# Allegro board 4BITCOUNTER.brd
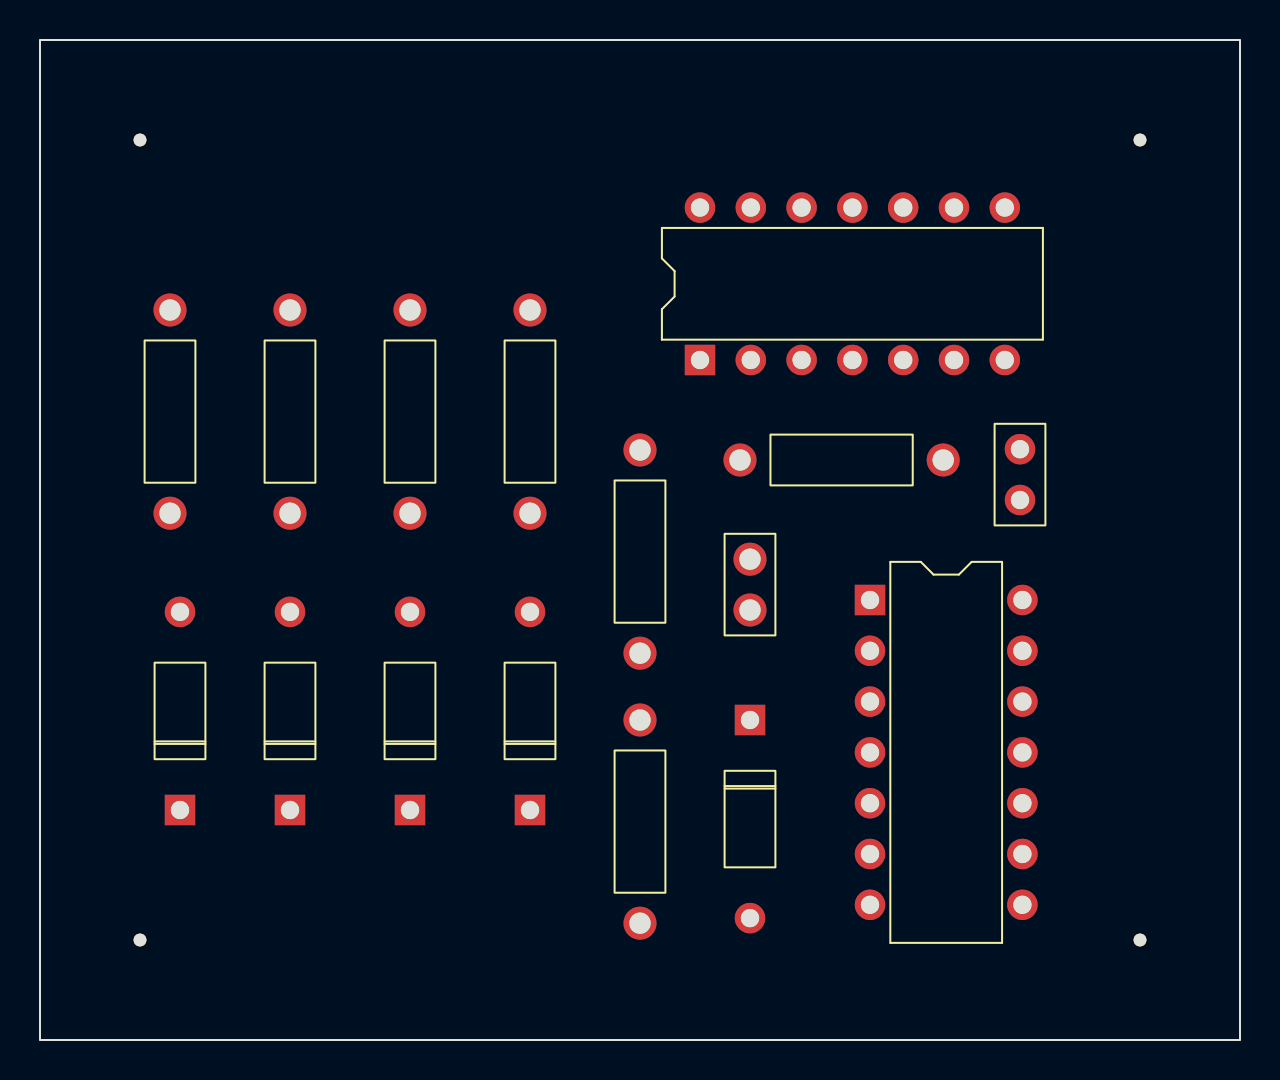
[diagram p0: board, top side]
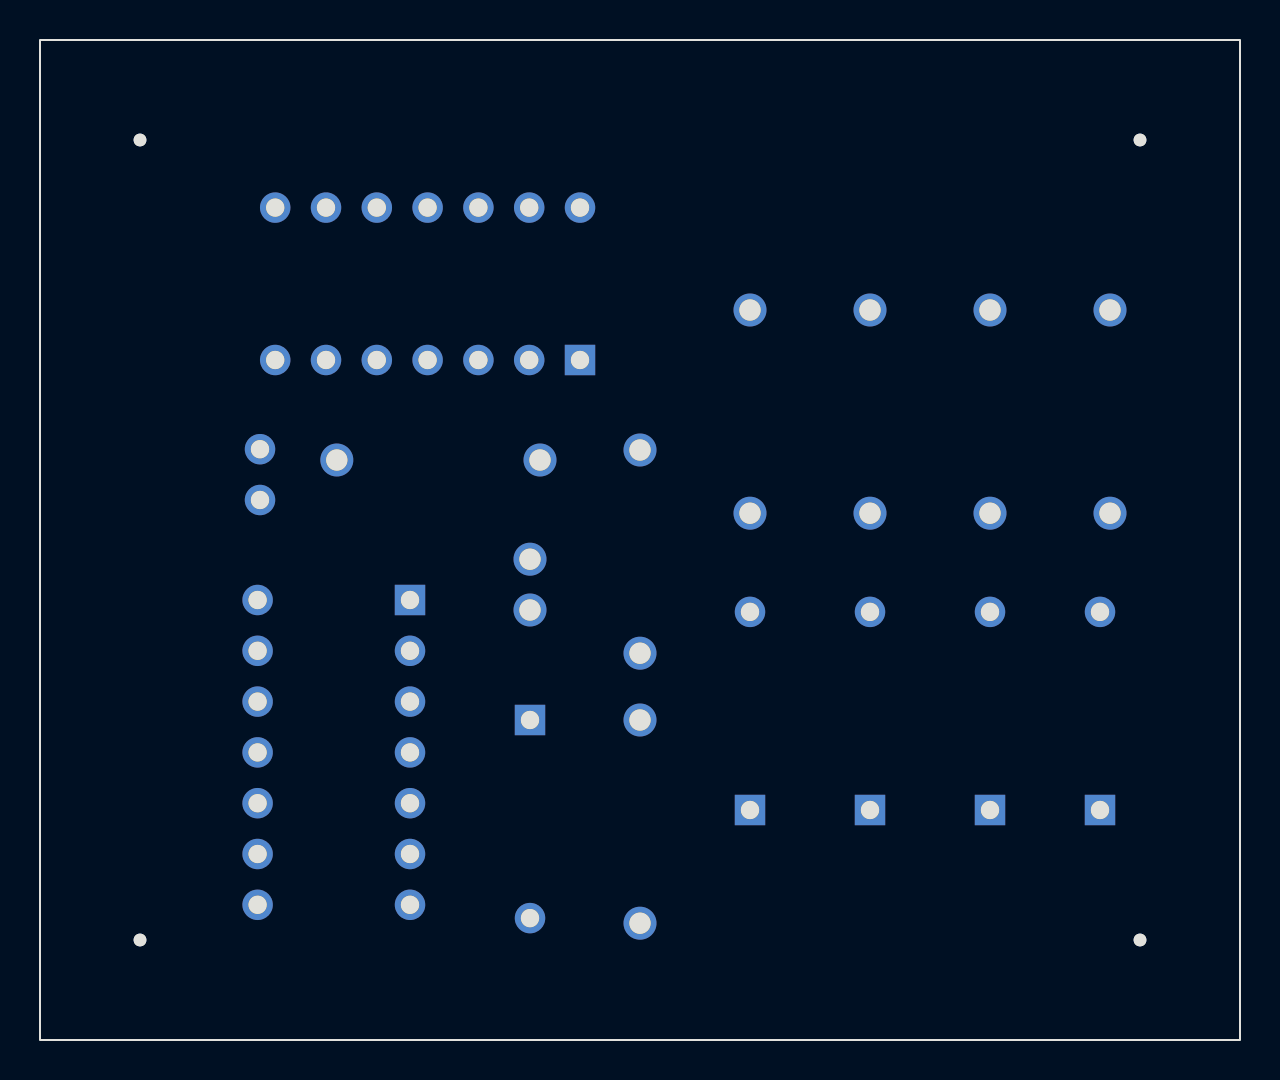
[diagram p1: board, bottom side, seen from below]

Outline 60 x 50 mm; copper layers: TOP, BOTTOM. Coordinates in mm from the lower left corner of the outline.
Outline path: rectangle 0,0 60,50

## Placement (name value [footprint] x y rotation side)
C1  100uF  [CAPCK05]  35.5 21.5 0 top
D1  LED  [DO41]  35.5 16 180 top
D2  LED  [DO41]  7 11.5 0 top
D3  LED  [DO41]  12.5 11.5 0 top
D4  LED  [DO41]  18.5 11.5 0 top
D5  LED  [DO41]  24.5 11.5 0 top
NOREF  -  [unnamed]  5 5 0 top
NOREF#2  -  [unnamed]  55 45 0 top
NOREF#3  -  [unnamed]  5 45 0 top
NOREF#4  -  [unnamed]  55 5 0 top
R1  30K  [RES400]  30 29.5 180 top
R2  200  [RES400]  30 16 180 top
R3  200  [RES400]  6.5 36.5 180 top
R4  200  [RES400]  12.5 36.5 180 top
R5  200  [RES400]  18.5 36.5 180 top
R6  200  [RES400]  24.5 36.5 180 top
R7  200  [RES400]  35 29 270 top
SW1  SW MAG-SPST  [JUMPER2]  49 27 90 top
U1  74HC93/SO  [DIP14_3]  33 34 90 top
U2  74HC14  [DIP14_3]  41.5 22 0 top

## Library data of the parts
C1 = CAP NP: Tolerance: ***; User Part Number: ***
D1-D5 = LED
R1-R7 = R: Tolerance: ***; User Part Number: ***
SW1 = SW MAG-SPST: User Part Number: ***
U1 = 74HC93/SO_1: Tolerance: ***; User Part Number: ***
U2 = 74HC14: Tolerance: ***; User Part Number: ***

## Footprints (pads in the part's own frame, mm; a bottom-side part is the same pattern mirrored in y, then rotated)
CAPCK05
  round 1.651 hole 1.067: 1(0,0) 2(0,2.54)
DIP14_3
  rect 1.524x1.524 hole 0.914: 1(0,0)
  round 1.524 hole 0.914: 2(0,-2.54) 3(0,-5.08) 4(0,-7.62) 5(0,-10.16) 6(0,-12.7) 7(0,-15.24) 8(7.62,-15.24) 9(7.62,-12.7) 10(7.62,-10.16) 11(7.62,-7.62) 12(7.62,-5.08) 13(7.62,-2.54) 14(7.62,0)
DO41
  rect 1.524x1.524 hole 0.914: 1(0,0)
  round 1.524 hole 0.914: 2(0,9.906)
JUMPER2
  round 1.524 hole 0.914: 1(0,0) 2(2.54,0)
RES400
  round 1.651 hole 1.067: 1(0,0) 2(0,10.16)
unnamed
  round 0.635 hole 3.175 unplated: (0,0)

## Nets
+5V: SW1.2 U1.2(R01) U1.5(VCC)
GND: C1.2 D1.1(CATHODE) D2.1(CATHODE) D3.1(CATHODE) D4.1(CATHODE) D5.1(CATHODE) R7.2 U1.10(GND) U2.7
VCC: U2.14
N00295: C1.1 R1.1 U2.1(A)
N00307: R1.2 U2.2(Y) U2.3(A)
N00328: R2.1 U1.14(C\L\K\A\) U2.4(Y)
N00344: R3.1 U1.11(QD)
N00351: R4.1 U1.8(QC)
N00358: R5.1 U1.9(QB)
N00367: R6.1 U1.1(C\L\K\B\) U1.12(QA)
N00445: D2.2(ANODE) R3.2
N00449: D3.2(ANODE) R4.2
N00453: D4.2(ANODE) R5.2
N00521: D1.2(ANODE) R2.2
N00654: R7.1 SW1.1 U1.3(R02)
N01143: D5.2(ANODE) R6.2

Pads without a net: U1 4 6 7 13; U2 5 6 8 9 10 11 12 13
